# EAGLE board nest_interface_a (EAGLE 6.3), part 1 of 2
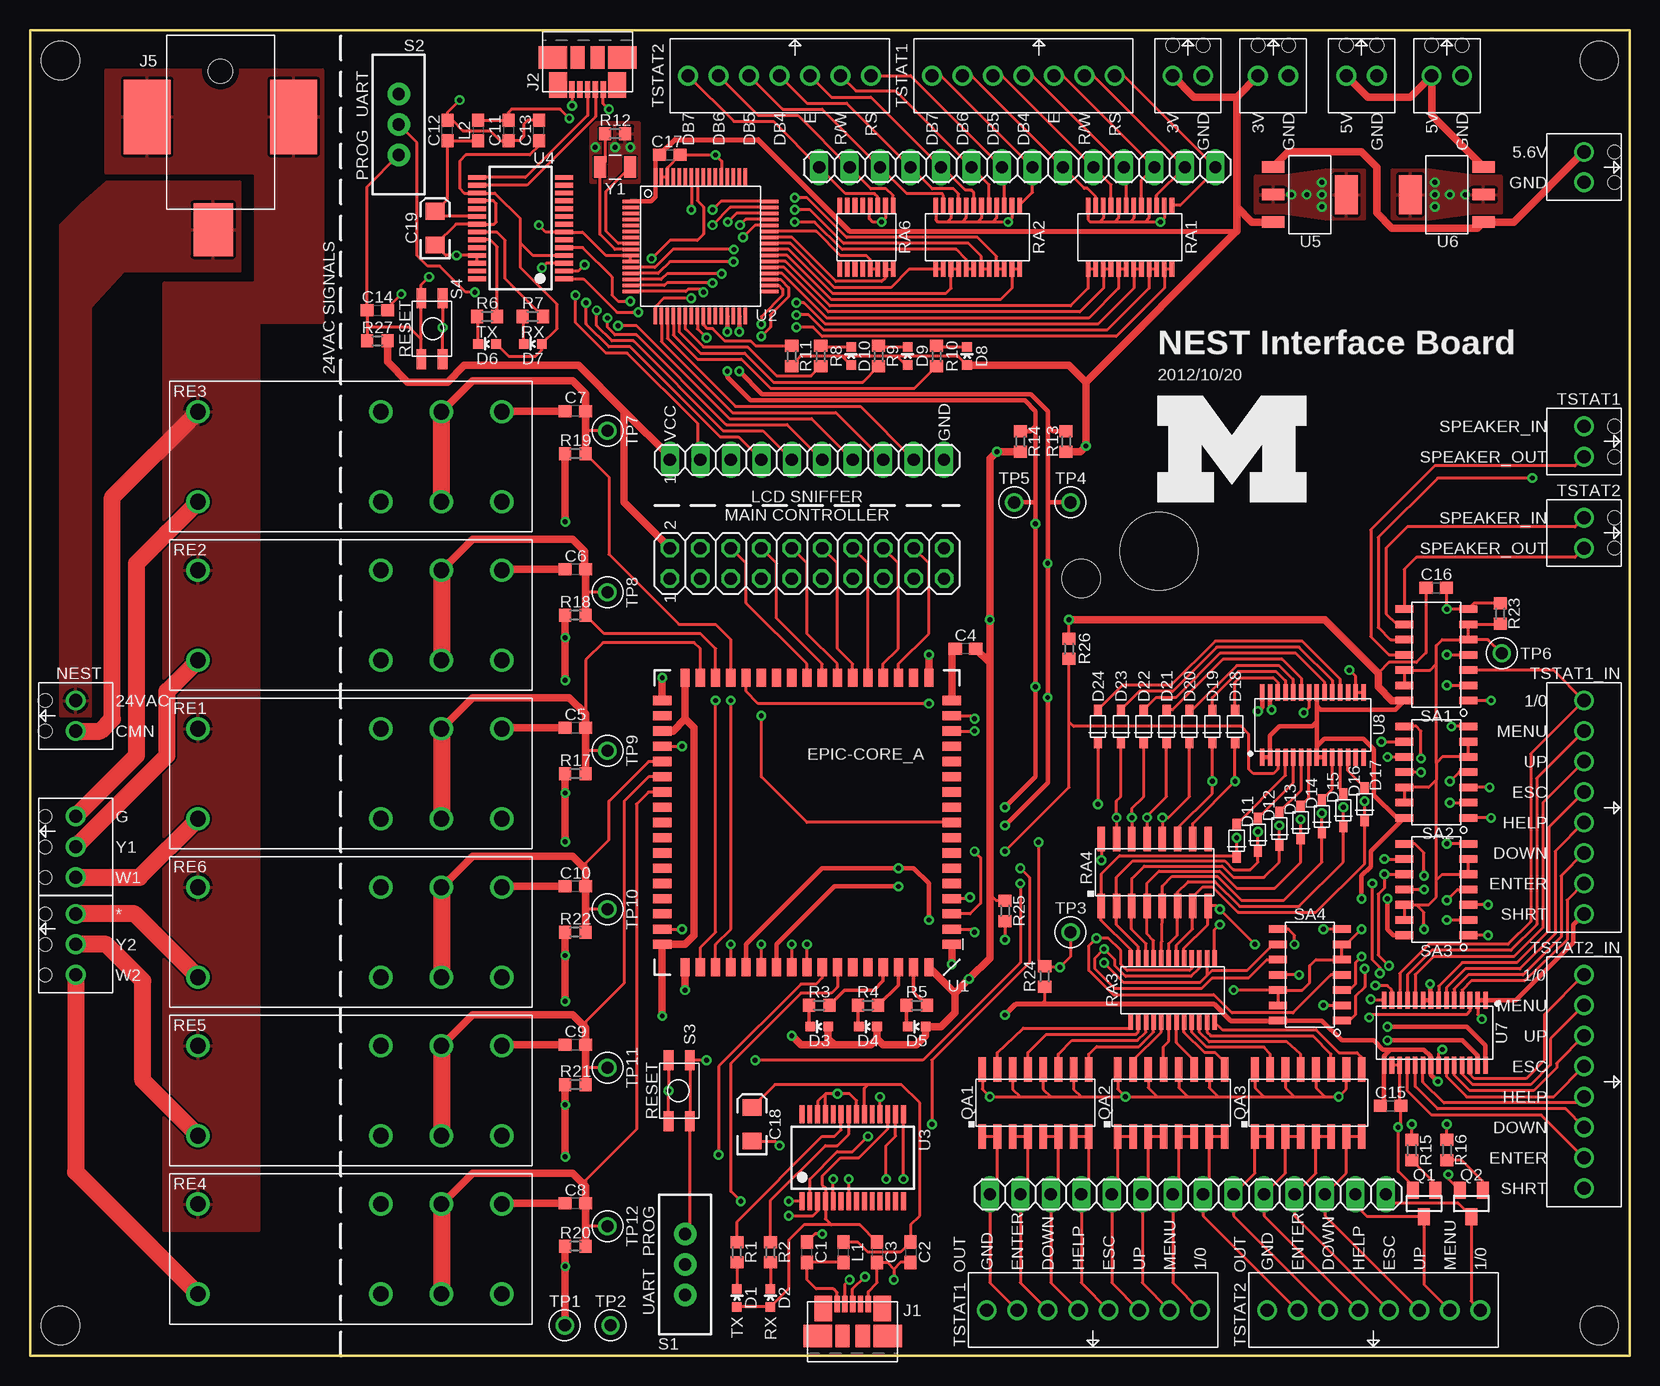
[diagram p0: board, top side]
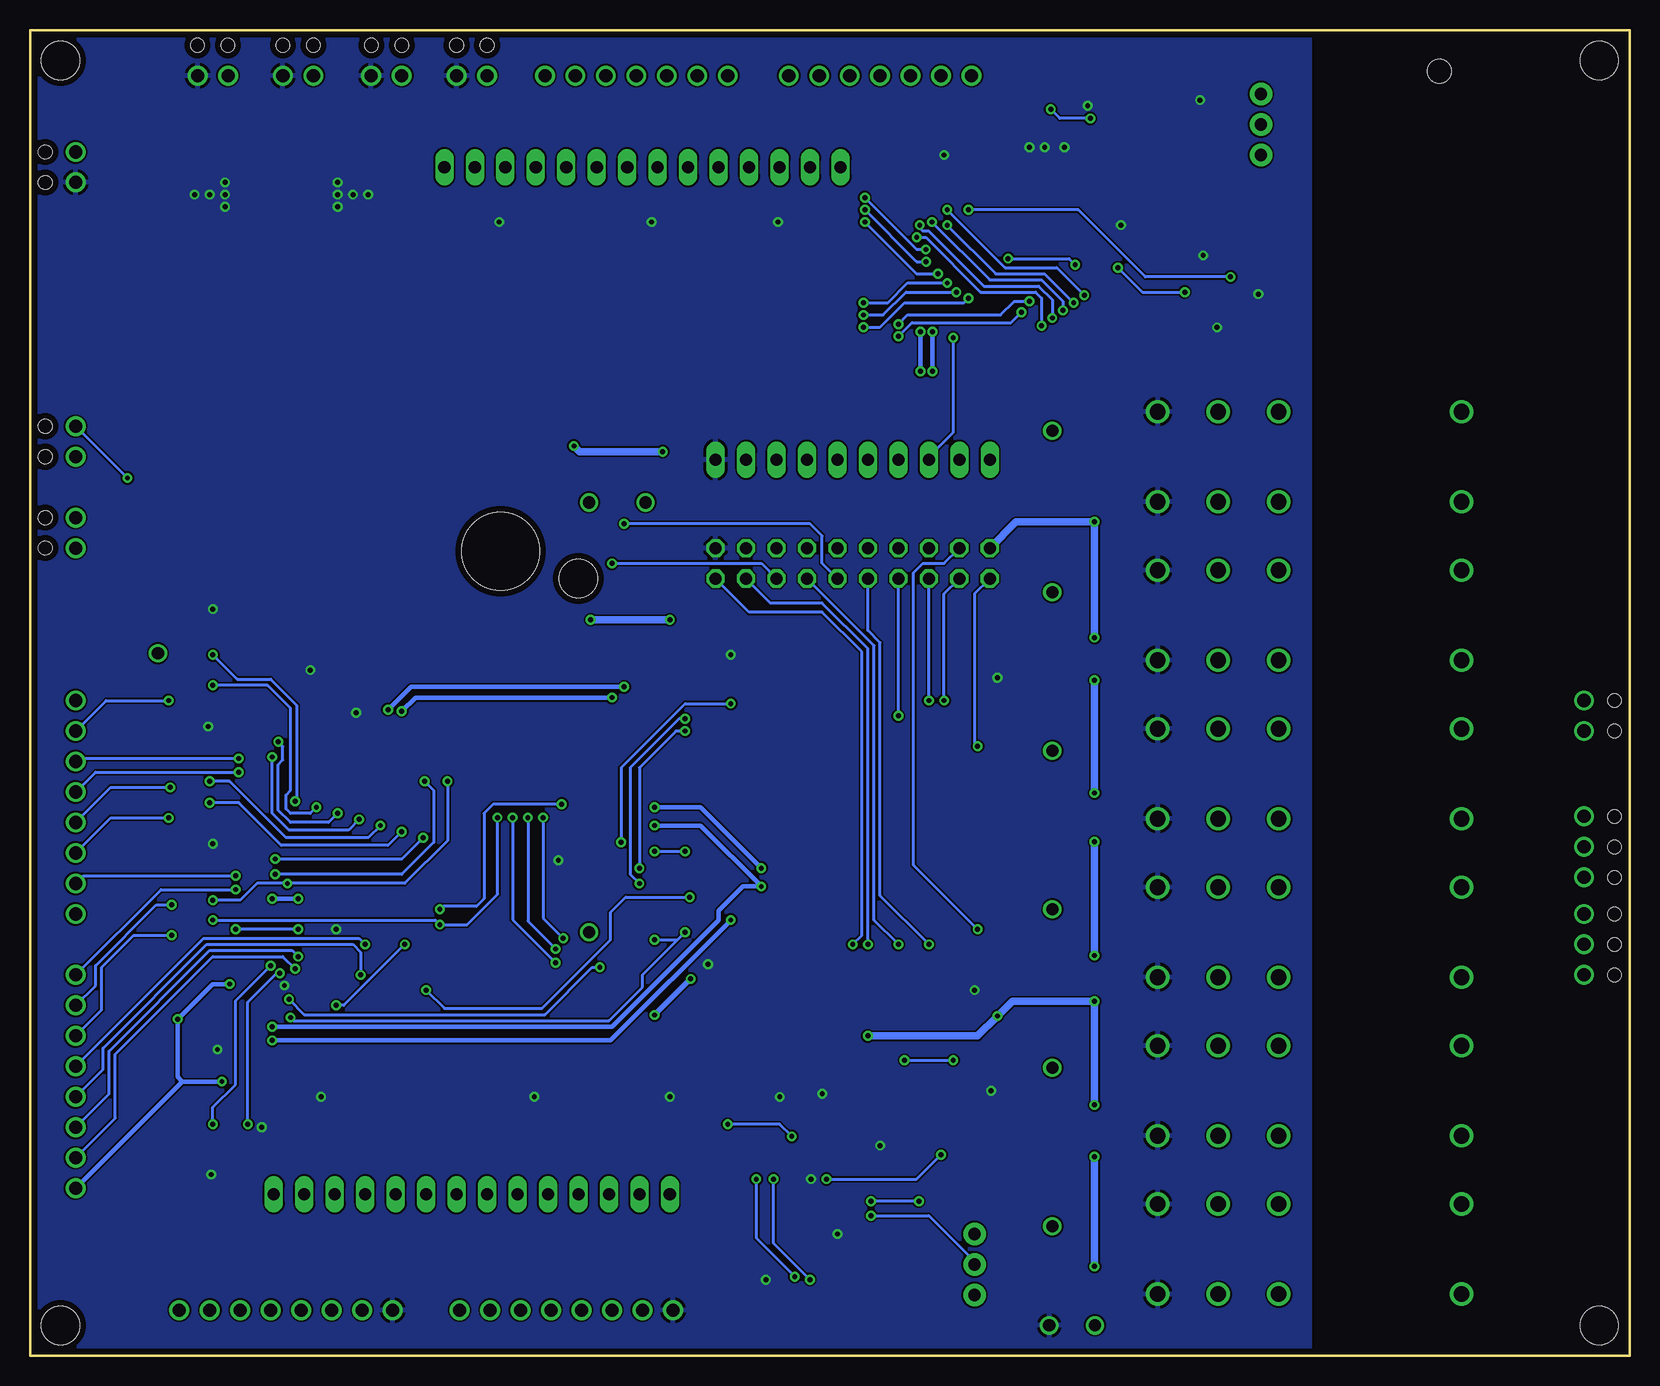
[diagram p1: board, bottom side, seen from below]

Size 133.35 x 110.49 mm. Coordinates in mm from the lower left corner, seen from the top.
Outline: 0,0 0,110.49 133.35,110.49 133.35,0 0,0
Copper layers (1*16): Top 0.0178mm / dielectric 59mil / Bottom 0.0178mm
Design rules "default": minimum track width 6mil, minimum drill 14mil, track to track 6mil, track to pad 6mil, pad to pad 6mil, via to via 6mil, smd to smd 6mil, copper to edge 20mil, drill to drill 16mil, minimum pad ring 8mil, minimum via ring 8mil, stop-mask expansion 3mil, vias tented up to drill 20mil, thermal gap 10mil
Holes 6.48 mm at 94.11,67.06
Holes 3.17 mm at 2.54,2.54 2.54,107.95 130.81,2.54 130.81,107.95 87.63,64.77

## Footprints (pad centres in the part's own frame; a part is rotated, then mirrored left to right if it is on the bottom)
C0603 = smd 1.1 x 1: 1 -0.85,0; 2 0.85,0
EIA3216 = smd 1.4 x 1.6: A 1.4,0; C -1.4,0
LED-0603 = smd 0.8 x 0.8: A 0,-0.75; C 0,0.75
SOD-323 = smd 0.889 x 0.686: P$1 -1.384,0; P$2 1.384,0
MOLEX_MICRO_USB_B_047346 = smd 1.38 x 0.45: D+ 2.66,0; D- 2.66,0.65; GND 2.66,-1.3; ID 2.66,-0.65; VCC 2.66,1.3 | smd 1.9 x 2.375: P$1 0,2.913; P$5 0,-2.913 | smd 2.1 x 1.475: P$2 2.3,2.462; P$6 2.3,-2.462 | smd 1.9 x 1.175: P$3 0,-0.838; P$4 0,0.838
2X10 = drill 1.016 octagon: 1 -11.43,-1.27; 2 -11.43,1.27; 3 -8.89,-1.27; 4 -8.89,1.27; 5 -6.35,-1.27; 6 -6.35,1.27; 7 -3.81,-1.27; 8 -3.81,1.27; 9 -1.27,-1.27; 10 -1.27,1.27; 11 1.27,-1.27; 12 1.27,1.27; 13 3.81,-1.27; 14 3.81,1.27; 15 6.35,-1.27; 16 6.35,1.27; 17 8.89,-1.27; 18 8.89,1.27; 19 11.43,-1.27; 20 11.43,1.27
PJ-0361-SMT = smd 4.4 x 3.3: 1 9.4,-0.6 | smd 6.2 x 3.9: 2 0,6.1; 3 0,-6.1 | hole 2: -3.8,0
CONN_BLOCK_2 = drill 1.1: 1 -1.27,0; 2 1.27,0 | hole 1.12: -1.27,-2.54; 1.27,-2.54
CONN_BLOCK_3 = drill 1.1: 1 -2.54,0; 2 0,0; 3 2.54,0 | hole 1.1: -2.54,-2.54; 0,-2.54; 2.54,-2.54
CONN_BLOCK_7 = drill 1.1: 1 -7.62,0; 2 -5.08,0; 3 -2.54,0; 4 0,0; 5 2.54,0; 6 5.08,0; 7 7.62,0
CONN_BLOCK_8 = drill 1.1: 1 -8.89,0; 2 -6.35,0; 3 -3.81,0; 4 -1.27,0; 5 1.27,0; 6 3.81,0; 7 6.35,0; 8 8.89,0
1X10 = drill 1.016 long: 1 -11.43,0; 2 -8.89,0; 3 -6.35,0; 4 -3.81,0; 5 -1.27,0; 6 1.27,0; 7 3.81,0; 8 6.35,0; 9 8.89,0; 10 11.43,0
1X14 = drill 1.016 long: 1 -16.51,0; 2 -13.97,0; 3 -11.43,0; 4 -8.89,0; 5 -6.35,0; 6 -3.81,0; 7 -1.27,0; 8 1.27,0; 9 3.81,0; 10 6.35,0; 11 8.89,0; 12 11.43,0; 13 13.97,0; 14 16.51,0
0603 = smd 1.1 x 1: 1 -0.85,0; 2 0.85,0
SOT23 = smd 1 x 1.4: 1 -0.95,-1.1; 2 0.95,-1.1; 3 0,1.1
SOIC-16 = smd 2.032 x 0.635: 1 -2.794,4.445; 2 -2.794,3.175; 3 -2.794,1.905; 4 -2.794,0.635; 5 -2.794,-0.635; 6 -2.794,-1.905; 7 -2.794,-3.175; 8 -2.794,-4.445; 9 2.794,-4.445; 10 2.794,-3.175; 11 2.794,-1.905; 12 2.794,-0.635; 13 2.794,0.635; 14 2.794,1.905; 15 2.794,3.175; 16 2.794,4.445
R0603 = smd 1 x 1.1: 1 -0.85,0; 2 0.85,0
LSSOP-24 = smd 0.381 x 1.27: 1 -3.493,-2.667; 2 -2.857,-2.667; 3 -2.223,-2.667; 4 -1.587,-2.667; 5 -0.953,-2.667; 6 -0.318,-2.667; 7 0.318,-2.667; 8 0.953,-2.667; 9 1.587,-2.667; 10 2.223,-2.667; 11 2.857,-2.667; 12 3.493,-2.667; 13 3.493,2.667; 14 2.857,2.667; 15 2.223,2.667; 16 1.587,2.667; 17 0.953,2.667; 18 0.318,2.667; 19 -0.318,2.667; 20 -0.953,2.667; 21 -1.587,2.667; 22 -2.223,2.667; 23 -2.857,2.667; 24 -3.493,2.667
LSSOP-16 = smd 0.381 x 1.27: 1 -2.223,-2.667; 2 -1.587,-2.667; 3 -0.953,-2.667; 4 -0.318,-2.667; 5 0.318,-2.667; 6 0.953,-2.667; 7 1.587,-2.667; 8 2.223,-2.667; 9 2.223,2.667; 10 1.587,2.667; 11 0.953,2.667; 12 0.318,2.667; 13 -0.318,2.667; 14 -0.953,2.667; 15 -1.587,2.667; 16 -2.223,2.667
S0418-CA = drill 1.3: A1 -12.67,-3.75; A2 -12.67,3.75; COMMON1 7.63,-3.75; COMMON2 7.63,3.75; NC1 2.59,-3.75; NC2 2.59,3.75; NO1 12.67,-3.75; NO2 12.67,3.75
SWITCH-SPDT = drill 1.016 pad 1.88: 1 0,2.54; 2 0,0; 3 0,-2.54
EVQP2 = smd 1.676 x 0.813: P$1 -2.54,-0.87; P$2 -2.54,0.908; P$3 2.54,-0.87; P$4 2.54,0.908
SOIC-14 = smd 0.635 x 1.524: 1 -3.81,-2.667; 2 -2.54,-2.667; 3 -1.27,-2.667; 4 0,-2.667; 5 1.27,-2.667; 6 2.54,-2.667; 7 3.81,-2.667; 8 3.81,2.667; 9 2.54,2.667; 10 1.27,2.667; 11 0,2.667; 12 -1.27,2.667; 13 -2.54,2.667; 14 -3.81,2.667
TESTPOINT_0.040IN = drill 1.016: TESTPOINT 0,0
EPIC-LCC68 = smd 1.524 x 0.762: P$1 -12.065,10.16; P$2 -12.065,8.89; P$3 -12.065,7.62; P$4 -12.065,6.35; P$5 -12.065,5.08; P$6 -12.065,3.81; P$7 -12.065,2.54; P$8 -12.065,1.27; P$9 -12.065,0; P$10 -12.065,-1.27; P$11 -12.065,-2.54; P$12 -12.065,-3.81; P$13 -12.065,-5.08; P$14 -12.065,-6.35; P$15 -12.065,-7.62; P$16 -12.065,-8.89; P$17 -12.065,-10.16; P$35 12.065,-10.16; P$36 12.065,-8.89; P$37 12.065,-7.62; P$38 12.065,-6.35; P$39 12.065,-5.08; P$40 12.065,-3.81; P$41 12.065,-2.54; P$42 12.065,-1.27; P$43 12.065,0; P$44 12.065,1.27; P$45 12.065,2.54; P$46 12.065,3.81; P$47 12.065,5.08; P$48 12.065,6.35; P$49 12.065,7.62; P$50 12.065,8.89; P$51 12.065,10.16 | smd 0.762 x 1.524: P$18 -10.16,-12.065; P$19 -8.89,-12.065; P$20 -7.62,-12.065; P$21 -6.35,-12.065; P$22 -5.08,-12.065; P$23 -3.81,-12.065; P$24 -2.54,-12.065; P$25 -1.27,-12.065; P$26 0,-12.065; P$27 1.27,-12.065; P$28 2.54,-12.065; P$29 3.81,-12.065; P$30 5.08,-12.065; P$31 6.35,-12.065; P$32 7.62,-12.065; P$33 8.89,-12.065; P$34 10.16,-12.065; P$52 10.16,12.065; P$53 8.89,12.065; P$54 7.62,12.065; P$55 6.35,12.065; P$56 5.08,12.065; P$57 3.81,12.065; P$58 2.54,12.065; P$59 1.27,12.065; P$60 0,12.065; P$61 -1.27,12.065; P$62 -2.54,12.065; P$63 -3.81,12.065; P$64 -5.08,12.065; P$65 -6.35,12.065; P$66 -7.62,12.065; P$67 -8.89,12.065; P$68 -10.16,12.065
PM/PAG64 = smd 1.4 x 0.3: 1 -5.8,3.75; 2 -5.8,3.25; 3 -5.8,2.75; 4 -5.8,2.25; 5 -5.8,1.75; 6 -5.8,1.25; 7 -5.8,0.75; 8 -5.8,0.25; 9 -5.8,-0.25; 10 -5.8,-0.75; 11 -5.8,-1.25; 12 -5.8,-1.75; 13 -5.8,-2.25; 14 -5.8,-2.75; 15 -5.8,-3.25; 16 -5.8,-3.75; 33 5.8,-3.75; 34 5.8,-3.25; 35 5.8,-2.75; 36 5.8,-2.25; 37 5.8,-1.75; 38 5.8,-1.25; 39 5.8,-0.75; 40 5.8,-0.25; 41 5.8,0.25; 42 5.8,0.75; 43 5.8,1.25; 44 5.8,1.75; 45 5.8,2.25; 46 5.8,2.75; 47 5.8,3.25; 48 5.8,3.75 | smd 0.3 x 1.4: 17 -3.75,-5.8; 18 -3.25,-5.8; 19 -2.75,-5.8; 20 -2.25,-5.8; 21 -1.75,-5.8; 22 -1.25,-5.8; 23 -0.75,-5.8; 24 -0.25,-5.8; 25 0.25,-5.8; 26 0.75,-5.8; 27 1.25,-5.8; 28 1.75,-5.8; 29 2.25,-5.8; 30 2.75,-5.8; 31 3.25,-5.8; 32 3.75,-5.8; 49 3.75,5.8; 50 3.25,5.8; 51 2.75,5.8; 52 2.25,5.8; 53 1.75,5.8; 54 1.25,5.8; 55 0.75,5.8; 56 0.25,5.8; 57 -0.25,5.8; 58 -0.75,5.8; 59 -1.25,5.8; 60 -1.75,5.8; 61 -2.25,5.8; 62 -2.75,5.8; 63 -3.25,5.8; 64 -3.75,5.8
SSOP28 = smd 0.4 x 1.5: 1 -4.225,-3.625; 2 -3.575,-3.625; 3 -2.925,-3.625; 4 -2.275,-3.625; 5 -1.625,-3.625; 6 -0.975,-3.625; 7 -0.325,-3.625; 8 0.325,-3.625; 9 0.975,-3.625; 10 1.625,-3.625; 11 2.275,-3.625; 12 2.925,-3.625; 13 3.575,-3.625; 14 4.225,-3.625; 15 4.225,3.625; 16 3.575,3.625; 17 2.925,3.625; 18 2.275,3.625; 19 1.625,3.625; 20 0.975,3.625; 21 0.325,3.625; 22 -0.325,3.625; 23 -0.975,3.625; 24 -1.625,3.625; 25 -2.275,3.625; 26 -2.925,3.625; 27 -3.575,3.625; 28 -4.225,3.625
SOT-223-3 = smd 0.95 x 1.9: 1 -2.3,-3.05; 2 0,-3.05; 3 2.3,-3.05 | smd 3.25 x 1.9: 4 0,3.05
TSSOP28 = smd 0.38 x 1.4: 1 -4.225,-2.7; 2 -3.575,-2.7; 3 -2.925,-2.7; 4 -2.275,-2.7; 5 -1.625,-2.7; 6 -0.975,-2.7; 7 -0.325,-2.7; 8 0.325,-2.7; 9 0.975,-2.7; 10 1.625,-2.7; 11 2.275,-2.7; 12 2.925,-2.7; 13 3.575,-2.7; 14 4.225,-2.7; 15 4.225,2.7; 16 3.575,2.7; 17 2.925,2.7; 18 2.275,2.7; 19 1.625,2.7; 20 0.975,2.7; 21 0.325,2.7; 22 -0.325,2.7; 23 -0.975,2.7; 24 -1.625,2.7; 25 -2.275,2.7; 26 -2.925,2.7; 27 -3.575,2.7; 28 -4.225,2.7
FC-135 = smd 1 x 1.8: 1 -1.25,0; 2 1.25,0

## Placement (x,y rotation side)
C1  0.1u  [C0603]  64.77,8.64 90 top
C2  0.1u  [C0603]  73.41,8.64 270 top
C3  0.1u  [C0603]  70.61,8.64 270 top
C4  0.1u  [C0603]  77.98,58.93 180 top
C5  0.1u  [C0603]  45.47,52.32 180 top
C6  0.1u  [C0603]  45.47,65.53 180 top
C7  0.1u  [C0603]  45.47,78.74 180 top
C8  0.1u  [C0603]  45.47,12.7 180 top
C9  0.1u  [C0603]  45.47,25.91 180 top
C10  0.1u  [C0603]  45.47,39.12 180 top
C11  0.1u  [C0603]  39.88,102.11 270 top
C12  0.1u  [C0603]  34.8,102.11 90 top
C13  0.1u  [C0603]  42.42,102.11 90 top
C14  0.1u  [C0603]  28.96,87.12 0 top
C15  0.1u  [C0603]  113.41,20.83 0 top
C16  0.1u  [C0603]  117.22,64.01 0 top
C17  1u  [C0603]  53.34,100.08 0 top
C18  10u  [EIA3216]  60.2,19.3 90 top
C19  10u  [EIA3216]  33.78,93.98 90 top
D1  RED  [LED-0603]  58.93,4.83 0 top
D2  BLUE  [LED-0603]  61.72,4.83 0 top
D3  RED  [LED-0603]  65.79,27.43 90 top
D4  GREEN  [LED-0603]  69.85,27.43 90 top
D5  BLUE  [LED-0603]  73.91,27.43 90 top
D6  RED  [LED-0603]  38.1,84.33 90 top
D7  BLUE  [LED-0603]  41.91,84.33 90 top
D8  RED  [LED-0603]  78.11,83.31 0 top
D9  GREEN  [LED-0603]  73.15,83.31 0 top
D10  BLUE  [LED-0603]  68.45,83.31 0 top
D11  B5818WS-SCHOTTKY-DIODE  [SOD-323]  100.58,42.93 270 top
D12  B5818WS-SCHOTTKY-DIODE  [SOD-323]  102.36,43.43 270 top
D13  B5818WS-SCHOTTKY-DIODE  [SOD-323]  104.14,43.94 270 top
D14  B5818WS-SCHOTTKY-DIODE  [SOD-323]  105.92,44.45 270 top
D15  B5818WS-SCHOTTKY-DIODE  [SOD-323]  107.7,44.96 270 top
D16  B5818WS-SCHOTTKY-DIODE  [SOD-323]  109.47,45.47 270 top
D17  B5818WS-SCHOTTKY-DIODE  [SOD-323]  111.25,45.97 270 top
D18  B5818WS-SCHOTTKY-DIODE  [SOD-323]  100.46,52.45 270 top
D19  B5818WS-SCHOTTKY-DIODE  [SOD-323]  98.55,52.45 270 top
D20  B5818WS-SCHOTTKY-DIODE  [SOD-323]  96.65,52.45 270 top
D21  B5818WS-SCHOTTKY-DIODE  [SOD-323]  94.74,52.45 270 top
D22  B5818WS-SCHOTTKY-DIODE  [SOD-323]  92.84,52.45 270 top
D23  B5818WS-SCHOTTKY-DIODE  [SOD-323]  90.93,52.45 270 top
D24  B5818WS-SCHOTTKY-DIODE  [SOD-323]  89.03,52.45 270 top
J1  MOLEX_MICRO_USB_B_047346  [MOLEX_MICRO_USB_B_047346]  68.58,1.65 90 top
J2  MOLEX_MICRO_USB_B_047346  [MOLEX_MICRO_USB_B_047346]  46.48,108.2 270 top
J3  [2X10]  64.77,66.04 0 top
J5  PJ-036A-SMT  [PJ-0361-SMT]  15.88,103.25 270 top
J6  CONN_BLOCK_2  [CONN_BLOCK_2]  3.81,53.34 270 top
J7  CONN_BLOCK_2  [CONN_BLOCK_2]  129.54,99.06 90 top
J8  CONN_BLOCK_2  [CONN_BLOCK_2]  111,106.68 180 top
J9  CONN_BLOCK_2  [CONN_BLOCK_2]  118.11,106.68 180 top
J10  CONN_BLOCK_2  [CONN_BLOCK_2]  96.52,106.68 180 top
J11  CONN_BLOCK_2  [CONN_BLOCK_2]  103.63,106.68 180 top
J12  CONN_BLOCK_2  [CONN_BLOCK_2]  129.54,76.2 90 top
J13  CONN_BLOCK_2  [CONN_BLOCK_2]  129.54,68.58 90 top
J14  CONN_BLOCK_3  [CONN_BLOCK_3]  3.81,42.42 270 top
J15  CONN_BLOCK_3  [CONN_BLOCK_3]  3.81,34.29 270 top
J16  CONN_BLOCK_7  [CONN_BLOCK_7]  82.8,106.68 180 top
J17  CONN_BLOCK_7  [CONN_BLOCK_7]  62.48,106.68 180 top
J18  CONN_BLOCK_8  [CONN_BLOCK_8]  129.54,45.72 90 top
J19  CONN_BLOCK_8  [CONN_BLOCK_8]  129.54,22.86 90 top
J20  CONN_BLOCK_8  [CONN_BLOCK_8]  88.65,3.81 0 top
J21  CONN_BLOCK_8  [CONN_BLOCK_8]  112.01,3.81 0 top
JP1  [1X10]  64.77,74.68 0 top
JP2  [1X14]  82.3,99.06 0 top
JP3  [1X14]  96.52,13.46 0 top
L1  [0603]  67.82,8.64 90 top
L2  [0603]  37.34,102.11 270 top
Q1  [SOT23]  116.2,12.7 180 top
Q2  [SOT23]  120.14,12.7 180 top
QA1  MMPQ2222A  [SOIC-16]  83.82,21.08 90 top
QA2  MMPQ2222A  [SOIC-16]  95.12,21.08 90 top
QA3  MMPQ2222A  [SOIC-16]  106.55,21.08 90 top
R1  240  [R0603]  58.93,8.64 270 top
R2  240  [R0603]  61.72,8.64 270 top
R3  240  [R0603]  65.79,29.21 180 top
R4  240  [R0603]  69.85,29.21 180 top
R5  240  [R0603]  73.91,29.21 180 top
R6  240  [R0603]  38.1,86.61 180 top
R7  240  [R0603]  41.91,86.61 180 top
R8  240  [R0603]  65.91,83.31 90 top
R9  240  [R0603]  70.74,83.31 90 top
R10  240  [R0603]  75.56,83.31 90 top
R11  100k 0.1%  [R0603]  63.5,83.31 90 top
R12  5.1M  [R0603]  48.77,101.85 180 top
R13  10k  [R0603]  86.36,76.2 90 top
R14  10k  [R0603]  82.55,76.2 90 top
R15  10k  [R0603]  115.19,17.14 90 top
R16  10k  [R0603]  118.11,17.14 90 top
R17  100k  [R0603]  45.47,48.51 180 top
R18  100k  [R0603]  45.47,61.72 180 top
R19  100k  [R0603]  45.47,75.18 180 top
R20  100k  [R0603]  45.47,9.14 180 top
R21  100k  [R0603]  45.47,22.61 180 top
R22  100k  [R0603]  45.47,35.31 180 top
R23  100k  [R0603]  122.56,61.85 90 top
R24  100k  [R0603]  84.58,31.62 90 top
R25  100k  [R0603]  81.28,37.08 270 top
R26  100k  [R0603]  86.61,58.93 270 top
R27  100k  [R0603]  28.96,84.58 180 top
RA1  VSSR2403103  [LSSOP-24]  91.69,93.22 180 top
RA2  VSSR2403103  [LSSOP-24]  78.99,93.22 180 top
RA3  VSSR2403103  [LSSOP-24]  95.25,30.48 180 top
RA4  766161104GP  [SOIC-16]  93.75,40.28 90 top
RA6  VSSR1603103  [LSSOP-16]  69.72,93.22 180 top
RE1  RT314524  [S0418-CA]  26.67,48.51 0 top
RE2  RT314524  [S0418-CA]  26.67,61.72 0 top
RE3  RT314524  [S0418-CA]  26.67,74.93 0 top
RE4  RT314524  [S0418-CA]  26.67,8.89 0 top
RE5  RT314524  [S0418-CA]  26.67,22.1 0 top
RE6  RT314524  [S0418-CA]  26.67,35.31 0 top
S1  [SWITCH-SPDT]  54.61,7.62 0 top
S2  [SWITCH-SPDT]  30.73,102.62 180 top
S3  EVQP2  [EVQP2]  54.1,22.1 270 top
S4  EVQP2  [EVQP2]  33.53,85.6 90 top
SA1  TS12A44515DR  [SOIC-14]  117.22,58.42 90 top
SA2  TS12A44515DR  [SOIC-14]  117.22,48.64 90 top
SA3  TS12A44515DR  [SOIC-14]  117.22,38.86 90 top
SA4  TS12A44515DR  [SOIC-14]  106.68,31.75 90 top
TP1  TEST_POINT_0.040IN  [TESTPOINT_0.040IN]  44.58,2.54 0 top
TP2  TEST_POINT_0.040IN  [TESTPOINT_0.040IN]  48.39,2.54 0 top
TP3  TEST_POINT_0.040IN  [TESTPOINT_0.040IN]  86.74,35.31 0 top
TP4  TEST_POINT_0.040IN  [TESTPOINT_0.040IN]  86.74,71.12 0 top
TP5  TEST_POINT_0.040IN  [TESTPOINT_0.040IN]  82.04,71.12 0 top
TP6  TEST_POINT_0.040IN  [TESTPOINT_0.040IN]  122.68,58.55 0 top
TP7  TEST_POINT_0.040IN  [TESTPOINT_0.040IN]  48.13,77.09 0 top
TP8  TEST_POINT_0.040IN  [TESTPOINT_0.040IN]  48.13,63.63 0 top
TP9  TEST_POINT_0.040IN  [TESTPOINT_0.040IN]  48.13,50.42 0 top
TP10  TEST_POINT_0.040IN  [TESTPOINT_0.040IN]  48.13,37.21 0 top
TP11  TEST_POINT_0.040IN  [TESTPOINT_0.040IN]  48.13,24 0 top
TP12  TEST_POINT_0.040IN  [TESTPOINT_0.040IN]  48.13,10.79 0 top
U1  EPIC-CORE_A  [EPIC-LCC68]  64.77,44.45 180 top
U2  MSP430F1611IPM  [PM/PAG64]  55.88,92.46 0 top
U3  FT232RL  [SSOP28]  68.58,16.51 0 top
U4  FT232RL  [SSOP28]  40.89,93.98 90 top
U5  MPC1825  [SOT-223-3]  106.68,96.77 270 top
U6  TC1262  [SOT-223-3]  118.11,96.77 90 top
U7  PCA9575  [TSSOP28]  117.09,26.92 180 top
U8  PCA9575  [TSSOP28]  106.93,52.58 0 top
U$1  UMICH_SOLID_LARGE  [UMICH_SOLID_350MIL]  93.98,71.12 0 top
Y1  FC-135_32.768KA-A3  [FC-135]  48.77,99.06 180 top

## Library data of the parts
C1-C14 C17 R1-R27 = rcl
C15 C16 = rcl; REV: A; TITLE: Nest Interface Board
C18 C19 = SparkFun; DIGIKEY: 478-1655-1-ND
D1-D10 = SparkFun
D11-D24 = nest_interface; DIGIKEY: B5818WS-TPMSCT-ND
J1 J2 = nest_interface; DIGIKEY: WM17141CT-ND
J3 JP1-JP3 = pinhead
J5 = nest_interface; DIGIKEY: CP-036APJCT-ND
J6-J13 = nest_interface; DIGIKEY: 277-1273-ND
J14 J15 = nest_interface; DIGIKEY: 277-1274-ND
J16 J17 = nest_interface; DIGIKEY: 277-1278-ND
J18-J21 = nest_interface; DIGIKEY: 277-1279-ND
L1 L2 = SparkFun; DIGIKEY: 240-2373-1-ND
Q1 Q2 = nest_interface; DIGIKEY: 568-1636-1-ND
QA1-QA3 = nest_interface; DIGIKEY: MMPQ2222ACT-ND
RA1-RA3 = nest_interface; DIGIKEY: VSSR24-10K-JI-ND
RA4 = nest_interface; DIGIKEY: 766-161-R100KP-ND
RA6 = nest_interface; DIGIKEY: VSSR16-10K-JI-ND
RE1-RE6 = nest_interface; DIGIKEY: PB1238-ND
S1 S2 = SparkFun; DIGIKEY: EG1903-ND
S3 S4 = berkeley-epic; DIGIKEY: P11084SCT-ND
SA1-SA4 = nest_interface; DIGIKEY: 296-24790-1-ND
TP1-TP12 = nest_interface; DIGIKEY: 5001K-ND
U1 = berkeley-epic
U2 = hijack
U3 U4 = ftdichip; DIGIKEY: 768-1007-1-ND; MPN: FT232RL; OC_FARNELL: 1146032; OC_NEWARK: 91K9918
U5 = nest_interface; DIGIKEY: MCP1825S-3002E/DB-ND
U6 = nest_interface; DIGIKEY: TC1262-5.0VDB-ND
U7 U8 = nest_interface; DIGIKEY: 568-6647-1-ND
U$1 = nest_interface
Y1 = berkeley-epic; DIGIKEY: 535-9543-1-ND

## Nets
5.6V_SUPPLY: J7.2 U5.1 U6.1
5V: J8.2 J9.2 U6.3
#KEYPAD_ENABLE: R23.1 SA1.5 SA1.6 SA1.12 SA1.13 SA2.5 SA2.6 SA2.12 SA2.13 SA3.5 SA3.6 SA3.12 SA3.13 SA4.5 SA4.6 SA4.12 SA4.13 TP6.TESTPOINT U1.P$4
COMMON: J5.2 J5.3 J6.2 RE1.A2 RE2.A2 RE3.A2 RE4.A2 RE5.A2 RE6.A2
COOLING1_PIN: C6.1 R18.1 RE2.COMMON1 RE2.COMMON2 TP8.TESTPOINT U1.P$32
COOLING2_PIN: C9.1 R21.1 RE5.COMMON1 RE5.COMMON2 TP11.TESTPOINT U1.P$40
EPIC_ADC1: J3.18 U1.P$20
EPIC_ADC2: J3.16 U1.P$21
EPIC_ADC3: J3.14 U1.P$22
EPIC_ADC4: J3.12 U1.P$23
EPIC_ADC5: J3.10 U1.P$24
EPIC_ADC6/DAC0: J3.8 U1.P$25
EPIC_ADC7/DAC1: J3.6 U1.P$26
EPIC_MISO0: J3.13 U1.P$57
EPIC_P2.0: J3.1 U1.P$38
EPIC_P2.4: J3.5 U1.P$54
EPIC_P2.7: J3.3 U1.P$53
EPIC_P5.7: J3.7 U1.P$9
EPIC_STE0: J3.9 U1.P$55
EPIC_UART0RX: J3.19 U1.P$60
EPIC_UART0TX: J3.17 U1.P$59
FAN_PIN: C7.1 R19.1 RE3.COMMON1 RE3.COMMON2 TP7.TESTPOINT U1.P$31
G: J14.1 RE3.A1
GND: C1.2 C2.2 C3.2 C5.2 C6.2 C7.2 C8.2 C9.2 C10.2 C11.2 C12.2 C13.2 C14.2 C15.2 C16.2 C17.2 C18.C C19.C J1.GND J2.GND J3.20 J7.1 J8.1 J9.1 J10.1 J11.1 J20.1 J21.1 JP1.10 Q1.2 Q2.2 QA1.10 QA1.12 QA1.14 QA1.16 QA2.10 QA2.12 QA2.14 QA2.16 QA3.10 QA3.12 QA3.14 QA3.16 R12.1 R23.2 RA1.2 RA1.4 RA1.6 RA1.8 RA1.10 RA1.12 RA2.2 RA2.4 RA2.6 RA2.8 RA2.10 RA2.12 RA4.16 RA6.2 RA6.4 RE1.NO1 RE1.NO2 RE2.NO1 RE2.NO2 RE3.NO1 RE3.NO2 RE4.NO1 RE4.NO2 RE5.NO1 RE5.NO2 RE6.NO1 RE6.NO2 S3.P$1 S3.P$3 S4.P$1 S4.P$3 SA1.7 SA2.7 SA3.7 SA4.7 TP2.TESTPOINT U1.P$1 U1.P$18 U1.P$35 U1.P$52 U2.10 U2.11 U2.53 U2.62 U2.63 U3.7 U3.18 U3.21 U3.25 U3.26 U4.7 U4.18 U4.21 U4.25 U4.26 U5.2 U5.4 U6.2 U6.4 U7.13 U7.16 U7.17 U7.22 U8.15 U8.16 U8.22
HEATING1_PIN: C5.1 R17.1 RE1.COMMON1 RE1.COMMON2 TP9.TESTPOINT U1.P$33
HEATING2_PIN: C8.1 R20.1 RE4.COMMON1 RE4.COMMON2 TP12.TESTPOINT U1.P$41
I2C_SCL: J3.15 R13.2 TP4.TESTPOINT U1.P$58 U2.31 U7.28 U8.28
I2C_SDA: J3.11 R14.2 TP5.TESTPOINT U1.P$56 U2.29 U7.27 U8.27
LCDP_MISO0: U2.30
LCDP_MISO1: JP1.5 U2.46
LCDP_MOSI1: JP1.6 U2.45
LCDP_P1.6: JP1.8 U2.18
LCDP_P1.7: JP1.9 U2.19
LCDP_P2.3: U2.23
LCDP_P2.4: JP1.3 U2.24
LCDP_P2.7: U2.27
LCDP_P5.4: JP1.2 U2.48
LCDP_STE0: U2.28
LCDP_STE1: JP1.7 U2.44
LCDP_UCLK1: JP1.4 U2.47
LCDP_URXD0: U2.33
LCDP_UTXD0: U2.32
N$1: C1.1 J1.VCC L1.1
N$2: D1.C R1.2
N$3: J1.D- U3.16
N$4: J1.D+ U3.15
N$6: C2.1 C18.A L1.2 U3.20
N$7: D2.C R2.2
N$8: R10.1 U2.20
N$9: U1.P$62 U3.1
N$10: R1.1 U3.23
N$11: R2.1 U3.22
N$12: U1.P$61 U3.5
N$13: D8.C R10.2
N$14: U1.P$15 U3.2
N$15: C3.1 D1.A D2.A U3.4 U3.17
N$16: QA2.11 RA3.19
N$17: QA1.13 RA3.14
N$18: C4.2 U1.P$17
N$19: D3.C R3.2
N$20: D4.C R4.2
N$21: D5.C R5.2
N$22: R5.1 U1.P$67
N$23: R4.1 U1.P$66
N$24: R3.1 U1.P$65
N$25: QA1.11 RA3.15
N$26: QA1.9 RA3.16
N$27: QA3.9 RA3.24
N$28: QA3.15 RA3.21
N$29: QA3.13 RA3.22
N$30: QA3.11 RA3.23
N$31: Q1.1 R15.1
N$32: Q2.1 R16.1
N$33: QA1.15 RA3.13
N$34: QA2.15 RA3.17
N$37: QA2.9 RA3.20
N$38: U2.8 Y1.1
N$39: C11.1 J2.VCC L2.1
N$40: J2.D- U4.16
N$41: J2.D+ U4.15
N$43: C12.1 C19.A L2.2 U4.20
N$44: R6.1 U4.23
N$45: R7.1 U4.22
N$46: D6.C R6.2
N$47: D7.C R7.2
N$48: U2.35 U4.1
N$49: U2.34 U4.5
N$50: U2.57 U4.2
N$51: C13.1 D6.A D7.A U4.4 U4.17
N$52: R12.2 U2.9 Y1.2
N$53: D9.C R9.2
N$54: R11.2 U2.25
N$55: D10.C R8.2
N$56: R9.1 U2.21
N$57: R8.1 U2.22
N$58: QA2.13 RA3.18
P2.6: U2.26
P5.5: U2.49
P5.6: U2.50
P5.7: U2.51
P6.0: U2.59
P6.1: U2.60
P6.2: U2.61
P6.3: U2.2
P6.4: U2.3
P6.5: U2.4
P6.6: U2.5
P6.7: U2.6
RADIO_SFD: J3.4 U1.P$50
RH: J5.1 J6.1
RST: S1.1 S3.P$2 S3.P$4 U1.P$16
RST1: C14.1 R27.2 S2.1 S4.P$2 S4.P$4 U2.58
RST_USB: S1.2 U3.3
RST_USB1: S2.2 U4.3
STAR: J15.1 RE6.A1
STAR_PIN: C10.1 R22.1 RE6.COMMON1 RE6.COMMON2 TP10.TESTPOINT U1.P$39
TSTAT1_DOWN_IN: J18.3 SA2.1 U7.5
TSTAT1_DOWN_OUT: J20.3 JP3.2 QA1.3 QA1.4
TSTAT1_DOWN_OUT_CTRL: D12.P$2 RA3.11 RA4.2 SA2.2
TSTAT1_DOWN_OUT_PIN: D12.P$1 U8.5
TSTAT1_ENTER_IN: J18.2 SA3.8 U7.4
TSTAT1_ENTER_OUT: J20.2 JP3.1 QA1.1 QA1.2
TSTAT1_ENTER_OUT_CTRL: D11.P$2 RA3.12 RA4.1 SA3.9
TSTAT1_ENTER_OUT_PIN: D11.P$1 U8.4
TSTAT1_ESC_IN: J18.5 SA2.11 U7.7
TSTAT1_ESC_OUT: J20.5 JP3.4 QA1.7 QA1.8
TSTAT1_ESC_OUT_CTRL: D14.P$2 RA3.9 RA4.4 SA2.10
TSTAT1_ESC_OUT_PIN: D14.P$1 U8.7
TSTAT1_HELP_IN: J18.4 SA2.3 U7.6
TSTAT1_HELP_OUT: J20.4 JP3.3 QA1.5 QA1.6
TSTAT1_HELP_OUT_CTRL: D13.P$2 RA3.10 RA4.3 SA2.4
TSTAT1_HELP_OUT_PIN: D13.P$1 U8.6
TSTAT1_LCD_DB4: J16.4 JP2.11 RA1.7
TSTAT1_LCD_DB4_PIN: RA1.17 RA1.18 U2.36
TSTAT1_LCD_DB5: J16.5 JP2.10 RA1.9
TSTAT1_LCD_DB5_PIN: RA1.15 RA1.16 U2.37
TSTAT1_LCD_DB6: J16.6 JP2.9 RA1.11
TSTAT1_LCD_DB6_PIN: RA1.13 RA1.14 U2.38
TSTAT1_LCD_DB7: J16.7 JP2.8 RA2.1
TSTAT1_LCD_DB7_PIN: RA2.23 RA2.24 U2.39
TSTAT1_LCD_E: J16.3 JP2.12 RA1.5
TSTAT1_LCD_E_PIN: RA1.19 RA1.20 U2.15
TSTAT1_LCD_R/W: J16.2 JP2.13 RA1.3
TSTAT1_LCD_R/W_PIN: RA1.21 RA1.22 U2.16
TSTAT1_LCD_RS: J16.1 JP2.14 RA1.1
TSTAT1_LCD_RS_PIN: RA1.23 RA1.24 U2.17
TSTAT1_MENU_IN: J18.7 SA1.1 U7.11
TSTAT1_MENU_OUT: J20.7 JP3.6 QA2.3 QA2.4
TSTAT1_MENU_OUT_CTRL: D16.P$2 RA3.7 RA4.6 SA1.2
TSTAT1_MENU_OUT_PIN: D16.P$1 U8.11
TSTAT1_ON/OFF_IN: J18.8 SA1.3 U7.12
TSTAT1_ON/OFF_OUT: J20.8 JP3.7 QA2.5 QA2.6
TSTAT1_ON/OFF_OUT_CTRL: D17.P$2 RA3.6 RA4.7 SA1.4
TSTAT1_ON/OFF_OUT_PIN: D17.P$1 U8.12
TSTAT1_SPEAKER_IN: J12.2 SA1.10
TSTAT1_SPEAKER_OUT: J12.1 SA1.11
TSTAT1_UP_IN: J18.6 SA2.8 U7.10
TSTAT1_UP_OUT: J20.6 JP3.5 QA2.1 QA2.2
TSTAT1_UP_OUT_CTRL: D15.P$2 RA3.8 RA4.5 SA2.9
TSTAT1_UP_OUT_PIN: D15.P$1 U8.10
TSTAT2_DOWN_IN: J19.3 SA4.3 U7.19
TSTAT2_DOWN_OUT: J21.3 JP3.9 QA3.1 QA3.2
TSTAT2_DOWN_OUT_CTRL: D23.P$2 RA3.4 RA4.15 SA4.4
TSTAT2_DOWN_OUT_PIN: D23.P$1 U8.19
TSTAT2_ENTER_IN: J19.2 SA4.1 U7.18
TSTAT2_ENTER_OUT: J21.2 JP3.8 QA2.7 QA2.8
TSTAT2_ENTER_OUT_CTRL: D24.P$2 RA3.5 RA4.8 SA4.2
TSTAT2_ENTER_OUT_PIN: D24.P$1 U8.18
TSTAT2_ESC_IN: J19.5 SA4.8 U7.23
TSTAT2_ESC_OUT: J21.5 JP3.11 QA3.5 QA3.6
TSTAT2_ESC_OUT_CTRL: D21.P$2 RA3.2 RA4.13 SA4.9
TSTAT2_ESC_OUT_PIN: D21.P$1 U8.23
TSTAT2_HELP_IN: J19.4 SA4.11 U7.20
TSTAT2_HELP_OUT: J21.4 JP3.10 QA3.3 QA3.4
TSTAT2_HELP_OUT_CTRL: D22.P$2 RA3.3 RA4.14 SA4.10
TSTAT2_HELP_OUT_PIN: D22.P$1 U8.20
TSTAT2_LCD_DB4: J17.4 JP2.4 RA2.9
TSTAT2_LCD_DB4_PIN: RA2.15 RA2.16 U2.40
TSTAT2_LCD_DB5: J17.5 JP2.3 RA2.11
TSTAT2_LCD_DB5_PIN: RA2.13 RA2.14 U2.41
TSTAT2_LCD_DB6: J17.6 JP2.2 RA6.1
TSTAT2_LCD_DB6_PIN: RA6.15 RA6.16 U2.42
TSTAT2_LCD_DB7: J17.7 JP2.1 RA6.3
TSTAT2_LCD_DB7_PIN: RA6.13 RA6.14 U2.43
TSTAT2_LCD_E: J17.3 JP2.5 RA2.7
TSTAT2_LCD_E_PIN: RA2.17 RA2.18 U2.14
TSTAT2_LCD_R/W: J17.2 JP2.6 RA2.5
TSTAT2_LCD_R/W_PIN: RA2.19 RA2.20 U2.13
TSTAT2_LCD_RS: J17.1 JP2.7 RA2.3
TSTAT2_LCD_RS_PIN: RA2.21 RA2.22 U2.12
TSTAT2_MENU_IN: J19.7 SA3.3 U7.25
TSTAT2_MENU_OUT: J21.7 JP3.13 Q1.3
TSTAT2_MENU_OUT_CTRL: D19.P$2 R15.2 RA4.11 SA3.4
TSTAT2_MENU_OUT_PIN: D19.P$1 U8.25
TSTAT2_ON/OFF_IN: J19.8 SA3.11 U7.26
TSTAT2_ON/OFF_OUT: J21.8 JP3.14 Q2.3
TSTAT2_ON/OFF_OUT_CTRL: D18.P$2 R16.2 RA4.10 SA3.10
TSTAT2_ON/OFF_OUT_PIN: D18.P$1 U8.26
TSTAT2_SPEAKER_IN: J13.2 SA1.9
TSTAT2_SPEAKER_OUT: J13.1 SA1.8
TSTAT2_UP_IN: J19.6 SA3.1 U7.24
TSTAT2_UP_OUT: J21.6 JP3.12 QA3.7 QA3.8
TSTAT2_UP_OUT_CTRL: D20.P$2 RA3.1 RA4.12 SA3.2
TSTAT2_UP_OUT_PIN: D20.P$1 U8.24
TSTAT_IN_I2C_INT: R24.2 TP3.TESTPOINT U1.P$30 U7.14
TSTAT_IN_I2C_RST: R25.2 U1.P$2 U7.3
TSTAT_OUT_I2C_RST: R26.2 U1.P$3 U8.3
VCC: C4.1 C15.1 C16.1 C17.1 D3.A D4.A D5.A D8.A D9.A D10.A J3.2 J10.2 J11.2 J18.1 J19.1 JP1.1 R11.1 R13.1 R14.1 R17.2 R18.2 R19.2 R20.2 R21.2 R22.2 R24.1 R25.1 R26.1 R27.1 SA1.14 SA2.14 SA3.14 SA4.14 TP1.TESTPOINT U1.P$34 U1.P$37 U1.P$51 U1.P$68 U2.1 U2.64 U5.3 U7.1 U7.2 U7.8 U7.9 U7.15 U7.21 U8.1 U8.2 U8.8 U8.9 U8.21
W1: J14.3 RE1.A1
W2: J15.3 RE4.A1
Y1: J14.2 RE2.A1
Y2: J15.2 RE5.A1